# Allegro board emoji-car-hardware.brd
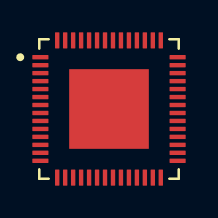
[diagram p0: board, top side]
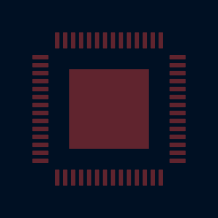
[diagram p1: board, bottom side, seen from below]

No outline. copper layers: TOP, BOTTOM. Coordinates in mm from the lowest, leftmost part position.

## Design rules (mm)
constraint set DEFAULT: min track width 0.127

## Placement (name value [footprint] x y rotation side)
U1  ESP32-S3R8  [QFN40P700X700X90-57N]  0 0 0 top

## Library data of the parts
U1 = ESP32-S3R8

## Footprints (pads in the part's own frame, mm; a bottom-side part is the same pattern mirrored in y, then rotated)
QFN40P700X700X90-57N
  custom 0.81x0.22 smd: 1(-3.445,2.6) 2(-3.445,2.2) 3(-3.445,1.8) 4(-3.445,1.4) 5(-3.445,1) 6(-3.445,0.6) 7(-3.445,0.2) 8(-3.445,-0.2) 9(-3.445,-0.6) 10(-3.445,-1) 11(-3.445,-1.4) 12(-3.445,-1.8) 13(-3.445,-2.2) 14(-3.445,-2.6) 29(3.445,-2.6) 30(3.445,-2.2) 31(3.445,-1.8) 32(3.445,-1.4) 33(3.445,-1) 34(3.445,-0.6) 35(3.445,-0.2) 36(3.445,0.2) 37(3.445,0.6) 38(3.445,1) 39(3.445,1.4) 40(3.445,1.8) 41(3.445,2.2) 42(3.445,2.6)
  custom 0.22x0.81 smd: 15(-2.6,-3.445) 16(-2.2,-3.445) 17(-1.8,-3.445) 18(-1.4,-3.445) 19(-1,-3.445) 20(-0.6,-3.445) 21(-0.2,-3.445) 22(0.2,-3.445) 23(0.6,-3.445) 24(1,-3.445) 25(1.4,-3.445) 26(1.8,-3.445) 27(2.2,-3.445) 28(2.6,-3.445) 43(2.6,3.445) 44(2.2,3.445) 45(1.8,3.445) 46(1.4,3.445) 47(1,3.445) 48(0.6,3.445) 49(0.2,3.445) 50(-0.2,3.445) 51(-0.6,3.445) 52(-1,3.445) 53(-1.4,3.445) 54(-1.8,3.445) 55(-2.2,3.445) 56(-2.6,3.445)
  rect 4x4 smd: 57(0,0)

## Nets
GND: U1.57
VDD3P3: U1.2 U1.3
VDD3P3_CPU: U1.46
VDD3P3_RTC: U1.20
VDD_SPI: U1.29
VDDA1: U1.55
VDDA2: U1.56

Pads without a net: U1 1 4 5 6 7 8 9 10 11 12 13 14 15 16 17 18 19 21 22 23 24 25 26 27 28 30 31 32 33 34 35 36 37 38 39 40 41 42 43 44 45 47 48 49 50 51 52 53 54
